# Altium PCB CH32H417MEU6-UHSIF-Top-R0.PcbDoc (part 1 of 2)
Units mil, origin at the board's own origin, x right, y up, seen from the top; angles counter-clockwise.
Board outline 2559.06 x 1771.65 mil, 4 copper layers (Top Layer, Layer 1, Layer 2, Bottom Layer), stack 23.756 mil thick; 66 components, 89 nets, 305 pads, 412 vias.
Unrouted connection lines stored in the file: 29.
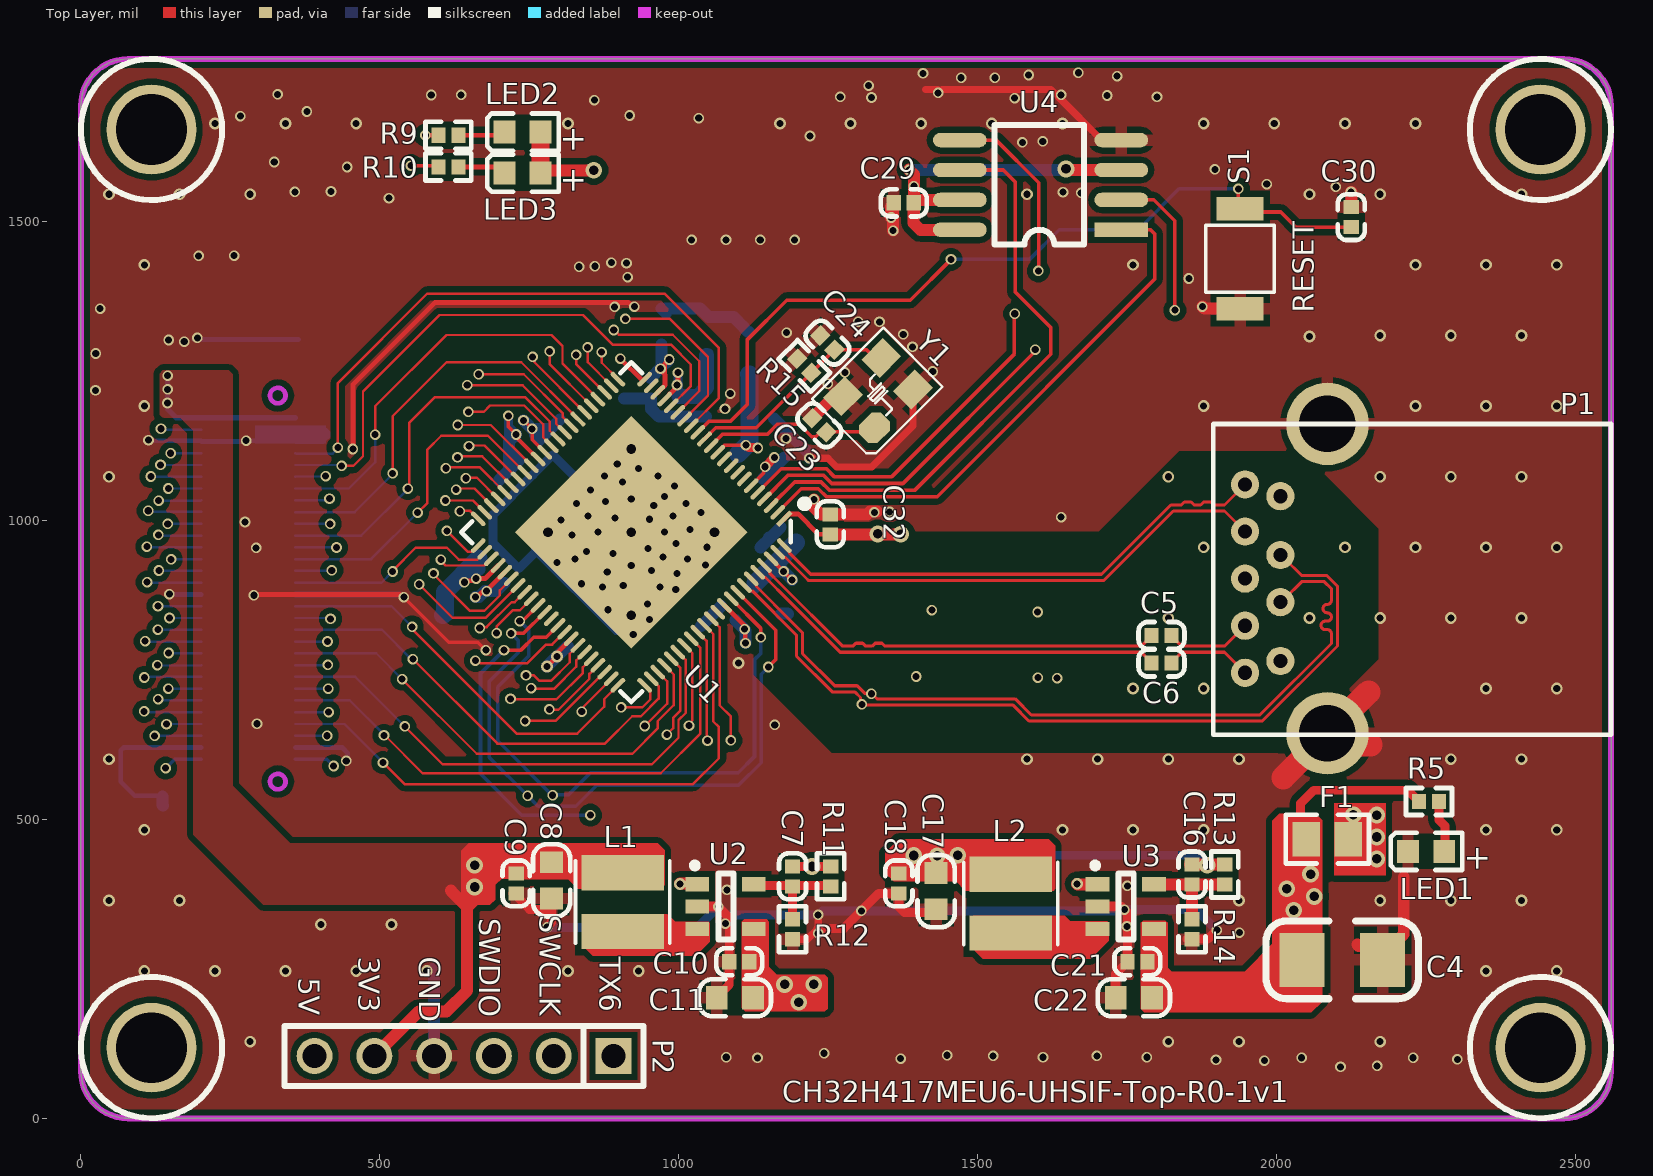
[diagram p0: Top Layer view]
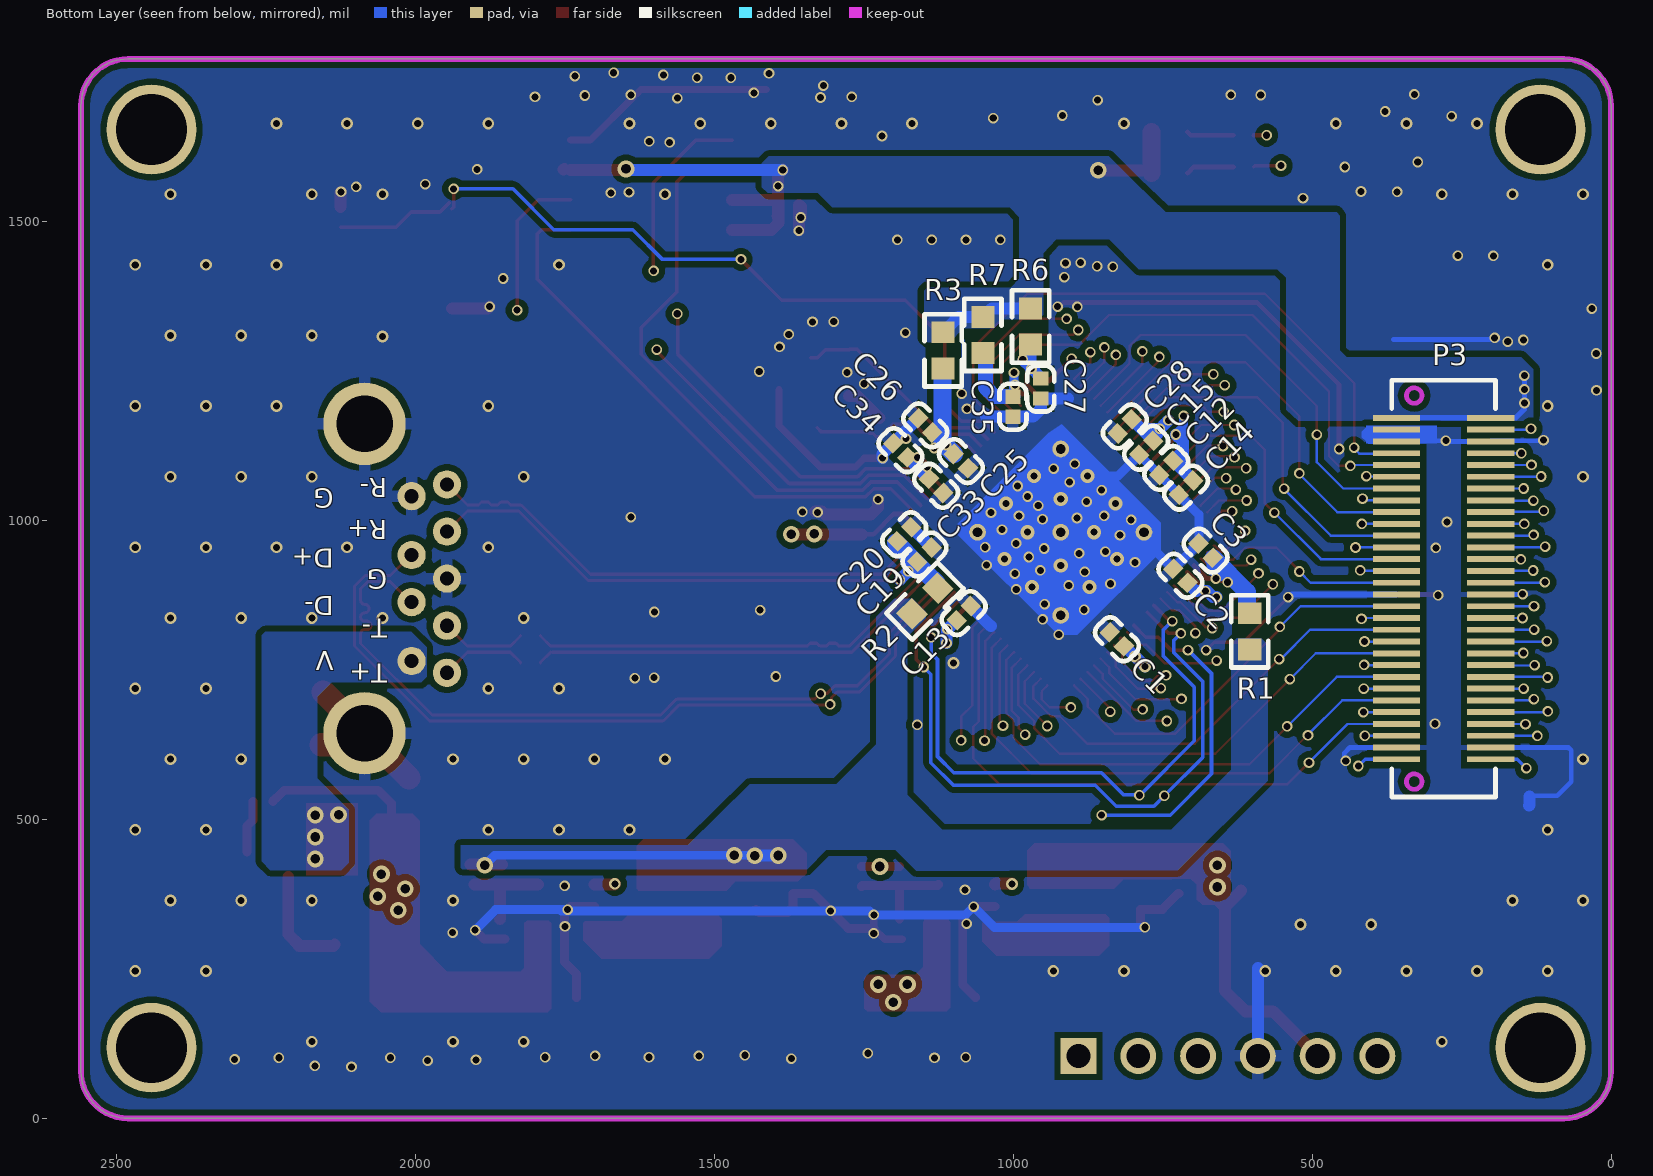
[diagram p1: Bottom Layer view, seen from below]
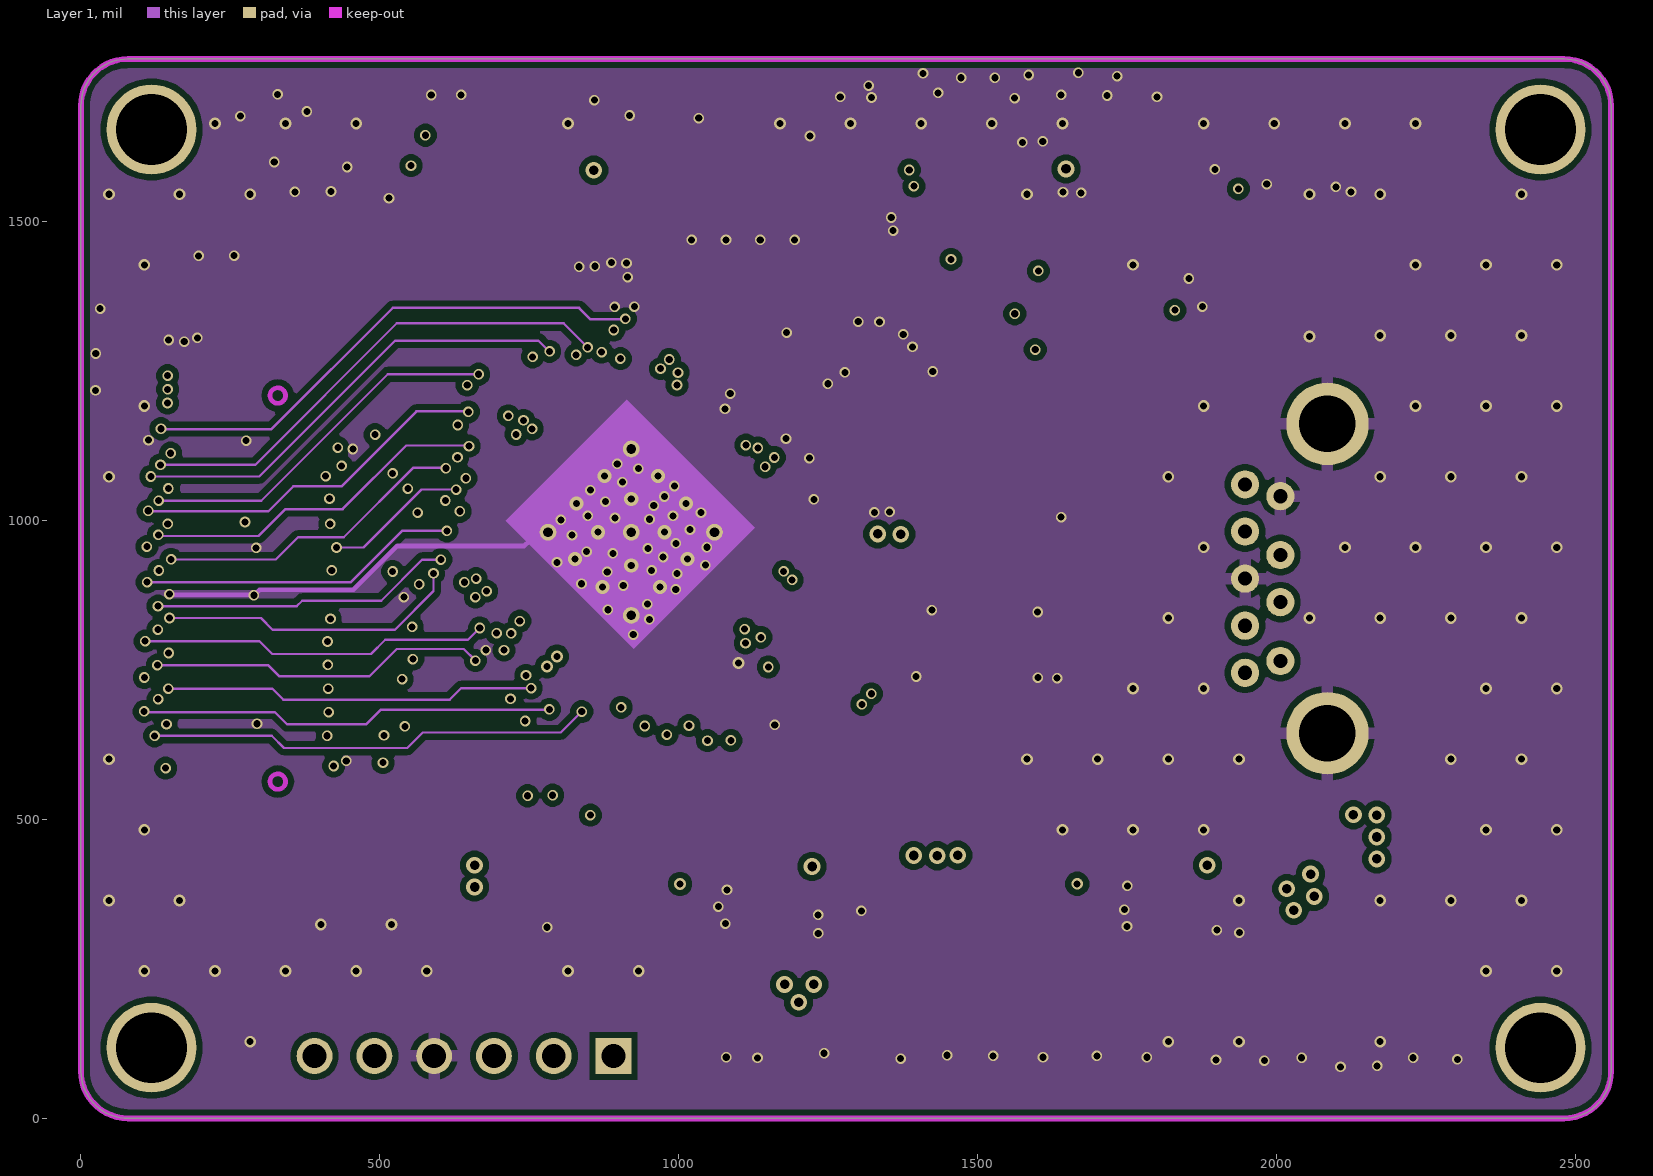
[diagram p2: Layer 1]
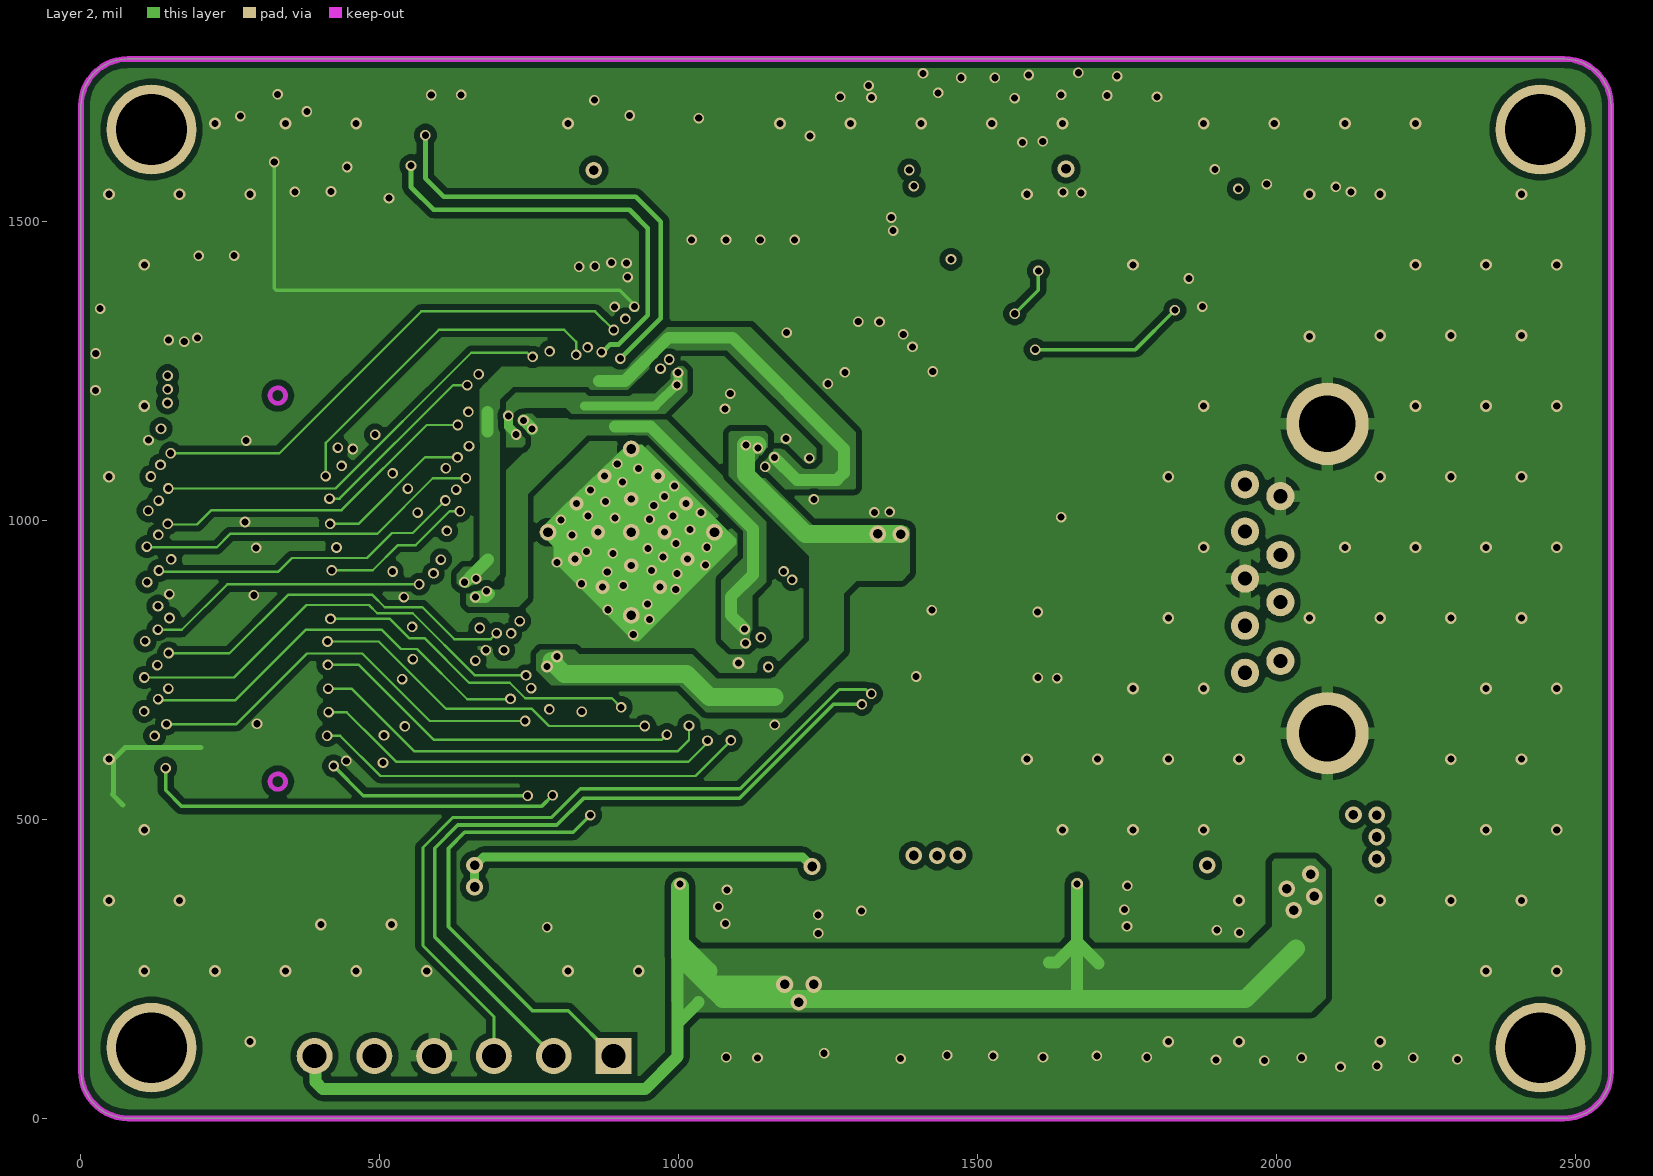
[diagram p3: Layer 2]

## Layer stack, top to bottom
Top Solder: solder mask 0.4, Solder Resist, Dk 3.5
Top Layer: signal copper 1.4
Dielectric 2: prepreg 2.8, PP-006, Dk 4.1
Layer 1: signal copper 1.378
Dielectric 1: dielectric 12.6, FR-4, Dk 4.8
Layer 2: signal copper 1.378
Dielectric 3: prepreg 2.8, PP-006, Dk 4.1
Bottom Layer: signal copper 1.4
Bottom Solder: solder mask 0.4, Solder Resist, Dk 3.5

## Board outline
0,78.74 ccw(c78.74,78.74) 78.74,0 2480.31,0 ccw(c2480.31,78.74) 2559.05,78.74 2559.06,1692.91 ccw(c2480.32,1692.91) 2480.32,1771.65 78.74,1771.65 ccw(c78.74,1692.91) 0,1692.91

## Design rules (kind name [scope] priority, off if disabled: settings)
Clearance Clearance_1 [InPolygon] p1: gap=10 ignorepadtopadclearanceinfootprint=FALSE
Clearance [All] p2: gap=5 ignorepadtopadclearanceinfootprint=FALSE except(4: Arc-SMDPad Track-SMDPad; 6: Arc-THPad Arc-Via Track-THPad Track-Via Via-Fill Via-Poly Via-Region)
ComponentClearance [All] p1 off: gap=10 collisioncheckmode=3 verticalgap=10 showdistances=FALSE
DiffPairsRouting [All] p1: maxlimit=10 minlimit=5 mostfreqgap=8 toplayer_minwidth=4 toplayer_maxwidth=15 toplayer_prefwidth=8 midlayer1_minwidth=4 midlayer1_maxwidth=15 midlayer1_prefwidth=8 midlayer2_minwidth=4 midlayer2_maxwidth=15 midlayer2_prefwidth=8 bottomlayer_minwidth=4 bottomlayer_maxwidth=15 bottomlayer_prefwidth=8 maxuncoupledlength=500
HoleToHoleClearance [All] p1: gap=8 allowstackedmicrovias=TRUE
MinimumAnnularRing [All] p1: minimumring=2.76
MinimumSolderMaskSliver [All] p1 off: minsoldermaskwidth=10
PlaneConnect [All] p1: planeconnectstyle=Direct reliefexpansion=20 reliefentries=4 reliefconductorwidth=10 reliefairgap=10
PolygonConnect PolygonConnect_2 [InPolygonClass('New Class')] p1: connectstyle=Direct reliefconductorwidth=10 reliefentries=4 polygonreliefangle="90 Angle" airgapwidth=10
PolygonConnect PolygonConnect_1 [IsVia] p2: connectstyle=Direct reliefconductorwidth=10 reliefentries=4 polygonreliefangle="90 Angle" airgapwidth=10
PolygonConnect [All] p3: connectstyle=Relief reliefconductorwidth=20 reliefentries=4 polygonreliefangle="90 Angle" airgapwidth=10
RoutingVias [All] p1: holewidth=7.87 width=17.72 viastyle="Through Hole" minholewidth=5.91 minwidth=11.81 maxholewidth=28 maxwidth=50
SilkToSilkClearance [All] p1 off: silktosilkclearance=10
SilkToSolderMaskClearance [IsPad] p1 off: minsilkscreentomaskgap=10 clearancetoexposedcopper=TRUE
SolderMaskExpansion [All] p1: expansion=2 istentingtop=FALSE
Width [All] p1: maxlimit=100 minlimit=4 preferedwidth=5
23 further rules are at their usual default settings.

## Classes and differential pairs
net class NewClass: UFP0 UFP1 UFP2 UFP3 UFP4 UFP5 UFP6 UFP7 UFP8 UFP9 UFP10 UFP11 UFP12 UFP13 UFP14 UFP15 UFP16 UFP17 UFP18 UFP19 UFP20 UFP21 UFP22 UFP23 UFP24 UFP25 UFP26 UFP27 UFP28 UFP29 UFP30 UFP31 UFP32 UFP33 UFP34 UFP35 UFP36 UFP37 UFP38 UFP39 UFP40 UFP41 UFP42 UFP43 UFP44 UFP45 UFP46 UFP47 UFPCLK
polygon class "New Class": 1V2 3V3 +5V NetF1_1 VDD33 VDDIO VDDK VIO18
component class CH32H417MEU6-UHSIF-Top-R0-1v1: C1 C2 C3 C4 C5 C6 C7 C8 C9 C10 C11 C12 C13 C14 C15 C16 C17 C18 C19 C20 C21 C22 C23 C24 C25 C26 C27 C28 C29 C30 C32 C33 C34 C35 F1 L1 L2 LED1 LED2 LED3 P1 P2 P3 R1 R2 R3 R5 R6 R7 R9 R10 R11 R12 R13 R14 R15 S1 U1 U2 U3 U4 Y1
differential pair NewDifferentialPair2: +SWCLK -SWDIO
differential pair NewDifferentialPair1: +NetC5_2 -NetC6_2
differential pair USB_SSTX: +USB_SSTX_p -USB_SSTX_n
differential pair USB_SSRX: +USB_SSRX_p -USB_SSRX_n

## Components (designator, comment, footprint, x,y, rotation, side; value= is the part's Value field where it differs from the comment)
C1 "0.1uF" 0402_C 814.64,789.25 r315 bottom
C2 "0.1uF" 0402_C 708.44,895.45 r315 bottom
C3 "0.1uF" 0402_C 689.97,961.25 r135 bottom
C4 "47uF" 3528_C 2041.94,264.9 r180 top
C5 "0.1uF" 0402_C 1790.41,807.4 r90 top
C6 "0.1uF" 0402_C 1790.41,761.4 r90 top
C7 "20pF" 0402_C 1190.12,421.35 r0 top
C8 "10uF" 0603_C 787.05,367.52 r90 top
C9 "0.1uF" 0402_C 727.82,376.1 r180 top
C10 "0.1uF" 0402_C 1084.26,261.92 r90 top
C11 "10uF" 0603_C 1063.33,201.58 r0 top
C12 "0.1uF" 0402_C 732.07,1099.51 r225 bottom
C13 "0.1uF" 0402_C 1094.58,833.01 r45 bottom
C14 "4.7uF" 0402_C 699.07,1066.51 r225 bottom
C15 "0.1uF" 0402_C 789.36,1109.48 r45 bottom
C16 "20pF" 0402_C 1858.12,424.35 r0 top
C17 "10uF" 0603_C 1430.32,349.52 r90 top
C18 "0.1uF" 0402_C 1367.98,376.1 r180 top
C19 "0.1uF" 0402_C 1136.43,954.61 r225 bottom
C20 "4.7uF" 0402_C 1170.39,988.57 r225 bottom
C21 "0.1uF" 0402_C 1750.05,261.92 r90 top
C22 "10uF" 0603_C 1730.61,201.58 r0 top
C23 "20pF" 0402_C 1223.14,1170.79 r45 top
C24 "20pF" 0402_C 1236.71,1309.02 r45 top
C25 "0.1uF" 0402_C 1075.5,1087.24 r315 bottom
C26 "4.7uF" 0402_C 1158.84,1170.58 r135 bottom
C27 "0.1uF" 0402_C 953.7,1203.55 r0 bottom
C28 "4.7uF" 0402_C 825.06,1145.18 r45 bottom
C29 "0.1uF" 0402_C 1359.44,1530.9 r90 top
C30 "0.1uF" 0402_C 2124.54,1523.76 r0 top
C32 "0.1uF" 0402_C 1253.13,1009.99 r0 top
C33 "0.1uF" 0402_C 1116.98,1045.76 r315 bottom
C34 "4.7uF" 0402_C 1200.32,1129.1 r135 bottom
C35 "0.1uF" 0402_C 1000.31,1173.27 r0 bottom
F1 "2A" 0805 2119.52,466.82 r180 top
L1 "2.2uH" CD32 905.87,361.44 r90 top
L2 "2.2uH" CD32 1555.12,358.89 r90 top
LED1 "RED" 0603+ 2280.03,446.27 r180 top
LED2 "BLUE" 0603+ 768.81,1649.3 r180 top
LED3 "GREEN" 0603+ 768.81,1580.64 r180 top
P1 "USB3.0-A" USB3.0-A-RECEPTACLE 2005.99,764.72 r90 top
P2 "HEADER 6" SIP6-2.54mm 890.72,104.17 r270 top
P3 "HEADER 30x2" BTB-60P-P0.5-FR 280,885.83 r270 bottom
R1 "0R" 0603 604.25,844.51 r270 bottom
R2 "0R" 0603 1126.29,886.55 r315 bottom
R3 "0R" 0603 1117.12,1253.96 r90 bottom
R5 "1K" 0402 2271.3,529.77 r180 top
R6 "0R" 0603 970.84,1293.86 r90 bottom
R7 "0R" 0603 1050.61,1279.67 r90 bottom
R9 "470Ω" 0402 597.78,1643.99 r0 top
R10 "470Ω" 0402 597.78,1591.05 r0 top
R11 "10K" 0402 1253.82,421.35 r270 top
R12 "2.2K" 0402 1190.12,299.43 r90 top
R13 "10K" 0402 1913.12,424.35 r270 top
R14 "10K" 0402 1858.12,299.43 r90 top
R15 "NC" 0402 1197.82,1270.13 r315 top
S1 "" 贴片按键 1938.53,1521.07 r270 top
U1 "CH32H417MEU6" QFN88_10X10 920.4,980.11 r135 top
U2 "8503" SOT-23-5 1030.63,391.29 r270 top
U3 "8503" SOT-23-5 1700.12,391.29 r270 top
U4 "SPI FLASH" SOIC-8_208mil 1739.9,1485.9 r90 top
Y1 "25M" XT3225 1327.41,1154.68 r45 top
? "Comment" HOLE 2440.94,118.11 r0 top
? "Comment" HOLE 118.11,118.11 r0 top
? "Comment" HOLE 118.11,1653.54 r0 top
? "Comment" HOLE 2440.94,1653.54 r0 top

## Footprints (in the part's own frame and the unit in brackets; to place one, negate y for a bottom-side part, rotate by r counter-clockwise, add the part's x,y. Pads: shape width x height; smd on the part's side, far side on the other; paste and mask are expansions set on the pad)
0402 [mm]
  rect 0.6x0.65 smd mask+0.051: 1(0,0) 2(0.85,0)
  silkscreen extent -0.55,-0.58 1.4,0.57
0402_C [mm]
  rect 0.65x0.6 smd mask+0.051: 1(0,0) 2(0,-0.85)
  silkscreen extent -0.58,-1.4 0.57,0.55
0603 [mm]
  rect 0.93x0.98 smd: 1(0,0) 2(1.54,0)
  silkscreen extent -0.76,-0.79 2.3,0.79
0603+ [mm]
  rect 0.93x0.98 smd: 1(0,0) 2(1.54,0)
  silkscreen extent -0.76,-0.79 2.27,0.79
0603_C [mm]
  rect 0.93x0.98 smd mask+0.051: 1(0,0) 2(1.54,0)
  silkscreen extent -0.76,-0.79 2.31,0.79
0805 [mm]
  rect 1.16x1.47 smd: 1(0,0) 2(1.78,0)
  silkscreen extent -0.88,-1.04 2.66,1.03
3528_C [mil]
  rect 75x90 smd: 1(0,0) 2(-135,0)
  silkscreen extent -195,-65 60,65
BTB-60P-P0.5-FR [mm]
  rect 0.25x2 smd mask+0.051: 1(-7.25,2) 2(-7.25,-2) 3(-6.75,2) 4(-6.75,-2) 5(-6.25,2) 6(-6.25,-2) 7(-5.75,2) 8(-5.75,-2) 9(-5.25,2) 10(-5.25,-2) 11(-4.75,2) 12(-4.75,-2) 13(-4.25,2) 14(-4.25,-2) 15(-3.75,2) 16(-3.75,-2) 17(-3.25,2) 18(-3.25,-2) 19(-2.75,2) 20(-2.75,-2) 21(-2.25,2) 22(-2.25,-2) 23(-1.75,2) 24(-1.75,-2) 25(-1.25,2) 26(-1.25,-2) 27(-0.75,2) 28(-0.75,-2) 29(-0.25,2) 30(-0.25,-2) 31(0.25,2) 32(0.25,-2) 33(0.75,2) 34(0.75,-2) 35(1.25,2) 36(1.25,-2) 37(1.75,2) 38(1.75,-2) 39(2.25,2) 40(2.25,-2) 41(2.75,2) 42(2.75,-2) 43(3.25,2) 44(3.25,-2) 45(3.75,2) 46(3.75,-2) 47(4.25,2) 48(4.25,-2) 49(4.75,2) 50(4.75,-2) 51(5.25,2) 52(5.25,-2) 53(5.75,2) 54(5.75,-2) 55(6.25,2) 56(6.25,-2) 57(6.75,2) 58(6.75,-2) 59(7.25,2) 60(7.25,-2)
  Keep-Out Layer circle w0.2: c8.2,-1.25 r0.33
  Keep-Out Layer circle w0.2: c-8.2,-1.25 r0.33
  silkscreen extent -8.85,-2.2 8.85,2.2
CD32 [mm]
  rect 1.5x3.5 smd: 1(-1.25,0) 2(1.25,0)
  silkscreen extent -1.75,-2 1.75,2
HOLE [mm]
  round 3.81 hole 3: 0(0,0)
  silkscreen extent -3,-3 3,3
QFN88_10X10 [mm]
  round 0.711 hole 0.406 mask+0.051: 0(-2.5,-2.5) 0(-2.5,2.5) 0(0,0) 0(2.5,2.5) 0(2.5,-2.5)
  rect 7x7 smd mask+0.051: 0(0,0)
  rect 0.2x0.8 smd mask+0.051: 1(-4.2,-5)
  oval 0.2x0.8 smd mask+0.051: 2(-3.8,-5) 3(-3.4,-5) 4(-3,-5) 5(-2.6,-5) 6(-2.2,-5) 7(-1.8,-5) 8(-1.4,-5) 9(-1,-5) 10(-0.6,-5) 11(-0.2,-5) 12(0.2,-5) 13(0.6,-5) 14(1,-5) 15(1.4,-5) 16(1.8,-5) 17(2.2,-5) 18(2.6,-5) 19(3,-5) 20(3.4,-5) 21(3.8,-5) 22(4.2,-5) 45(4.2,5) 46(3.8,5) 47(3.4,5) 48(3,5) 49(2.6,5) 50(2.2,5) 51(1.8,5) 52(1.4,5) 53(1,5) 54(0.6,5) 55(0.2,5) 56(-0.2,5) 57(-0.6,5) 58(-1,5) 59(-1.4,5) 60(-1.8,5) 61(-2.2,5) 62(-2.6,5) 63(-3,5) 64(-3.4,5) 65(-3.8,5) 66(-4.2,5)
  oval 0.8x0.2 smd mask+0.051: 23(5,-4.2) 24(5,-3.8) 25(5,-3.4) 26(5,-3) 27(5,-2.6) 28(5,-2.2) 29(5,-1.8) 30(5,-1.4) 31(5,-1) 32(5,-0.6) 33(5,-0.2) 34(5,0.2) 35(5,0.6) 36(5,1) 37(5,1.4) 38(5,1.8) 39(5,2.2) 40(5,2.6) 41(5,3) 42(5,3.4) 43(5,3.8) 44(5,4.2) 67(-5,4.2) 68(-5,3.8) 69(-5,3.4) 70(-5,3) 71(-5,2.6) 72(-5,2.2) 73(-5,1.8) 74(-5,1.4) 75(-5,1) 76(-5,0.6) 77(-5,0.2) 78(-5,-0.2) 79(-5,-0.6) 80(-5,-1) 81(-5,-1.4) 82(-5,-1.8) 83(-5,-2.2) 84(-5,-2.6) 85(-5,-3) 86(-5,-3.4) 87(-5,-3.8) 88(-5,-4.2)
  silkscreen extent -5.1,-6.19 5.1,5.1
SIP6-2.54mm [mil]
  rect 60x60 hole 40: 1(0,0)
  round 60 hole 40: 2(0,-100) 3(0,-200) 4(0,-300) 5(0,-400) 6(0,-500)
  silkscreen extent -50,-550 50,50
SOIC-8_208mil [mil]
  rect 24x90 smd: 1(0,0)
  oval 24x90 smd: 2(50,0) 3(100,0) 4(150,0) 5(150,270) 6(100,270) 7(50,270) 8(0,270)
  silkscreen extent -25,62 175,212
SOT-23-5 [mm]
  rect 0.6x1 smd: 1(0,0) 2(0.95,0) 3(1.9,0) 4(1.9,2.4) 5(0,2.4)
  silkscreen extent -0.92,-0.22 2.35,1.54
USB3.0-A-RECEPTACLE [mm]
  round 3.5 hole 2.4: 0(-3.07,-2) 0(10.07,-2)
  round 1.2 hole 0.6: 1(0,0) 2(2.5,0) 3(4.5,0) 4(7,0) 5(7.5,1.5) 6(5.5,1.5) 7(3.5,1.5) 8(1.5,1.5) 9(-0.5,1.5)
  silkscreen extent -3.14,-14.04 10.07,2.85
XT3225 [mm]
  oct 1.3x1.1 smd: 1(0,0)
  rect 1.3x1.1 smd: 2(2.3,0) 3(2.3,1.9) 4(0,1.9)
  silkscreen extent -1.02,-0.8 3.27,2.74
贴片按键 [mm]
  rect 1x2 smd: 1(0,0) 2(4.242,0)
  silkscreen extent 0.69,-1.45 3.55,1.45

## Part data
C1 C2 C3 C4 C5 C6 C7 C8 C9 C10 C11 C12 C13 C14 C15 C16 C17 C18 C19 C20 C21 C22 C23 C24 C25 C26 C27 C28 C29 C32 C33 C34 C35: library part CAP, "Capacitor"
C30: library part Cap, "Capacitor"
F1: library part FUSE1, "Fuse"
L1 L2: library part INDUCTOR
LED1 LED2 LED3: library part LED, "Typical INFRARED GaAs LED"
P2: "Header, 6-Pin"
P3: "Header, 30-Pin, Dual row"
R1 R2 R3 R5 R6 R7 R9 R10 R15: library part RES
R11 R12 R13 R14: library part R
S1: library part KEY1
U1: "RISC-V FPU HD-MCU, 384MHz, USB3.0 & PD, 100M Ethernet, DVP, SDMMC, QSPI, OPA, ADC, DAC"
U2 U3: library part FP6160
U4: library part W25Q64
Y1: library part XTAL, "Crystal Oscillator", LatestRevisionDate=17-Jul-2002, LatestRevisionNote="Re-released for DXP Platform.", PackageReference=R38, Published=8-Jun-2000, Publisher="Altium Limited"

## Via types
v1: diameter 17.72, hole 11.81, Top Layer to Bottom Layer, tented both sides, 286 vias
v2: diameter 19.68, hole 11.81, Top Layer to Bottom Layer, tented both sides, 92 vias
v3: diameter 28, hole 16, Top Layer to Bottom Layer, tented both sides, 22 vias
v4: diameter 23.62, hole 11.81, Top Layer to Bottom Layer, tented both sides, 12 vias

## Nets (pads, with @x,y where several pads share a name; then routed paths per layer and width w, separated by ;. In a path a pad name is that pad's centre, name@x,y a point inside that pad or via, vN(x,y) a via of type N, cw(c..) or ccw(c..) an arc to the next point about the centre after c; other vN are vias at no path point)
1V2: C16.1 C17.2 C18.2 L2.2 R1.2 R2.2 R13.1 | length 752.8
  Top Layer w20: C16.1@1855.12,424.35 1882.75,424.35 v3(1883.87,423.23) 1884.95,424.31 1907.84,424.31 R13.1@1907.84,424.63
  Top Layer w30: C18.2@1367.98,412.1 L2.2@1555.12,412.1
  Bottom Layer w15: v3@1432.17,439.85 v3(1466.45,439.85) 1867.26,439.85 v3(1883.87,423.23)
  Bottom Layer w20: R2.2@1170.53,843.01 1171.89,844.37 1181.61,844.37 R2.2@1182.97,843.01 ; v3@1392.65,439.1 v3(1432.17,439.1)
  other v3: 1392.65,439.46
3V3: C7.1 C8.2 C9.2 C29.2 L1.2 LED2.1 LED3.1 P2.5 P3.1 P3.2 R3.2 R6.2 R7.2 R11.1 U4.3 U4.7 U4.8 | length 2669.7
  Top Layer w15: C7.1@1190.12,421.35 R11.1@1253.82,421.35
  Top Layer w20: P2.5@490.72,104.17 565.47,178.92 611.4,178.92 646.04,213.56 646.04,353.32 ; 618.78,380.57 646.04,353.32 ; 673.3,380.57 646.04,353.32 ; C9.2@736.65,414.65 669.42,414.65 646.04,391.27 646.04,353.32 ; LED3.1@767.26,1584.77 767.87,1585.39 768.81,1585.39 v3(857.75,1585.39) ; v1@1384.65,1586.52 1393.2,1577.97 1393.2,1531.19 C29.2@1392.9,1530.9 1392.9,1510.76 1394.53,1509.13 ; C29.2@1392.05,1533.56 1392.05,1497.61 1403.76,1485.9 U4.8@1469.9,1485.9 ; C29.2@1397.02,1534.39 1398.52,1535.9 U4.7@1469.9,1535.9 ; v3@1646.44,1585.9 U4.3@1739.9,1585.9 ; U4.3@1750.75,1587.57 U4.3@1751.66,1586.66
  Top Layer w30: C9.2@736.65,414.65 L1.2@905.87,414.65 ; LED3.1@768.81,1580.64 768.81,1585.39 LED2.1@768.81,1649.3
  Layer 2 w15: v3(658.32,386.77) v3(658.32,423.09) 659.59,423.09 673.61,437.11 1206.65,437.11 v3(1222.77,421)
  Bottom Layer w8: v1(144.8,1196.22) v1@145,1196.01 ; v1(145,1241.98) v1(145,1219) v1@145,1196.01 ; 159.02,1171.26 145,1185.29 v1@145,1196.01
  Bottom Layer w9: v1@145,1196.01 145,1186.09 159.82,1171.26 P3.2@358.74,1171.26
  Bottom Layer w20: R6.2@970.84,1354.49 R6.2@978.43,1346.9 ; R6.2@971.82,1354.49 1035.43,1354.49 1049.62,1340.3 1091.41,1340.3 1107.82,1323.88 1107.82,1322.9 1116.13,1314.59 R3.2@1117.12,1314.59 ; v1(1385.28,1585.91) 1639.84,1585.91 v3@1643.64,1589.7
  other v1: 1393.05,1558.83
  other v3: 1647.41,1587.61
+5V: C4.1 C10.2 C11.2 C21.2 C22.2 F1.2 P2.6 R5.2 U2.1 U2.4 U3.1 U3.4 | length 3063.1
  Top Layer w15: F1.2@2039.6,475.17 2039.6,526.35 2061.83,548.58 2219.03,548.58 2232.54,535.07 2233.52,535.07 2237.84,530.76 R5.2@2237.84,529.77
  Top Layer w20: v2@1002,392.87 1029.05,392.87 U2.1@1030.63,391.29 ; v2(1666.12,392.13) 1666.96,391.29 U3.1@1700.12,391.29 ; C22.2@1789.24,201.58 1789.24,314.68 1791.05,316.49 U3.4@1794.6,316.49
  Top Layer w30: 1175.01,201.58 1175.3,201.28
  Layer 2 w20: P2.6@390.72,104.17 392.35,102.54 392.35,60.95 404.45,48.84 943.5,48.84 997.73,103.07 997.73,158.62 ; 997.73,270.59 997.73,158.62 ; 1033.21,194.1 997.73,158.62 ; 1618.92,260.12 1631.47,260.12 1666.12,294.77 ; 1666.12,199.3 1666.12,294.77 ; v2(1666.12,392.13) 1666.12,294.77 ; 1701.77,259.12 1666.12,294.77
  Layer 2 w30: 1002,288.37 v2@1002,387.87 ; 1049.39,245.98 1002,293.37 1002,270.59 1048.79,223.8 ; v3(1176.83,223.8) 1048.79,223.8 ; 2032.04,283.82 1947.52,199.3 1666.12,199.3 1177.28,199.3 1175.3,201.28 1173.32,199.3 1073.28,199.3 1048.79,223.8
  other v2: 1002,391.87
  other v3: 1200.33,193.93 1225.48,223.8 2028.31,347.89 2062.77,370.98 2016.58,383.81 2056.53,408.38
GND: C1.2 C2.2 C3.1 C4.2 C8.1 C9.1 C10.1 C11.1 C12.2 C13.2 C14.2 C15.1 C17.1 C18.1 C19.1 C20.1 C21.1 C22.1 C23.1 C24.1 C25.1 C26.1 C27.1 C28.1 C29.1 C30.1 C32.1 C33.1 C34.1 C35.1 LED1.2 P1.0 P1.4 P1.7 P2.4 P3.4 P3.5 P3.6 P3.31 P3.32 P3.57 P3.58 R12.1 R14.1 R15.1 S1.2 U1.0 U2.2 U3.2 U4.4 Y1.2 Y1.4 | length 8454.3
  Top Layer w6: v1@148,875.54 v1@148.22,875.76 ; v1(540.04,871.57) 615.43,796.18 663.85,796.18 v1(677.11,782.92)
  Top Layer w8: v1(454.92,1119.26) 454.92,1226.94 592.04,1364.06 916.07,1364.06 922.87,1357.26 v1(925.5,1357.26)
  Top Layer w9: v1@289.33,875.98 533.27,875.98 537.68,871.57 v1(540.04,871.57)
  Top Layer w12: R12.1@1185.12,299.43 1214.9,299.43 1233.01,317.54 v1(1233.01,340.27) ; v1(1218.23,1103.91) 1248.92,1103.91 1252.78,1100.05 1263.69,1089.14 1322.53,1089.14 1391.44,1158.06 Y1.2@1391.44,1218.71 ; 1412.27,1720.27 v1@1433.48,1720.27 ; v1@1433.48,1717.62 1435.02,1716.08 1436.12,1716.08 1440.31,1720.27 1622.53,1720.27 1630.06,1712.74 1636.71,1712.74 1637.49,1711.96 v1@1637.49,1709.78 ; v1@1635.26,1707.54 1706.9,1635.9 U4.4@1739.9,1635.9
  Top Layer w15: C9.1@722.82,376.1 723.81,376.1 750.4,349.52 787.05,349.52 787.05,327.61 779.57,320.13 v1(779.57,319.4) ; U2.2@1030.63,353.89 v1(1066.06,353.89) 1084.26,335.69 C10.1@1084.26,261.92 1084.26,223.5 1063.33,202.56 C11.1@1063.33,201.58 ; v1@1233.01,317.54 1275.89,317.54 v1(1305.18,346.82) 1334.46,376.1 C18.1@1367.98,376.1 1367.98,353.4 1377.26,344.13 1424.93,344.13 C17.1@1430.32,349.52 ; U3.2@1700.12,353.89 1739.92,353.89 v1(1744.98,348.83) 1750.05,343.77 C21.1@1750.05,261.92 1750.05,260.94 1730.61,241.5 C22.1@1730.61,201.58 ; R14.1@1850.12,299.43 1884.51,299.43 v1(1899.72,314.63)
  Top Layer w20: C23.1@1223.14,1170.79 1259.92,1207.58 Y1.4@1274.52,1207.58 ; v1(1225.86,1035.05) 1225.86,1021.71 1237.57,1009.99 C32.1@1253.13,1009.99 1315.07,1009.99 1319.63,1014.56 v1@1331.74,1014.56 ; v1(1355.17,1506.51) 1355.17,1524.48 1358.38,1527.69 v1(1358.38,1484.43) ; v1(1875.64,1357.38) 1878.94,1354.07 S1.2@1938.53,1354.07 ; v1(2124.1,1549.3) 2124.54,1548.86 C30.1@2124.54,1523.76 ; 2134.53,290.29 2136.48,288.34 2194.34,288.34 2194.34,289.8 2212.29,307.76 2212.29,403.62
  Top Layer w39.37: 2010.74,569.86 P1.0@2084.73,643.85 ; 2153.57,712.69 P1.0@2084.73,643.85 ; 2157.01,624.34 2156.33,625.02 2103.57,625.02 P1.0@2084.73,643.85
  Layer 1 w8: v1@148,875.54 288.81,875.54 289.7,874.66 298.87,883.83 455.74,883.83 529.16,957.25 741.54,957.25 749.54,965.25 801.85,965.25 809.85,957.25
  Layer 2 w6: v1(112.99,1133.98) v1@114.52,1132.44 ; v1(323.36,1599.22) 323.36,1388.29 326.88,1384.78 901.15,1384.78 925.5,1360.43 v1(925.5,1357.26)
  Layer 2 w8: 70.41,523.77 52.39,541.79 54.65,544.06 54.65,600.84 73.89,620.08 201.26,620.08
  Bottom Layer w8: v1(112.99,1133.98) 113.81,1133.15 P3.5@200.71,1133.15 ; 136.44,538.41 135.44,539.41 90.11,539.41 66.69,562.83 66.69,615.39 71.38,620.08 P3.57@201.26,620.08 ; v1@148,875.54 148.3,875.84 201.12,875.84 P3.31@201.26,875.98 ; v1@189.16,1302.32 364.2,1302.32 ; P3.5@201.26,1131.89 274.92,1131.89 v1(276.23,1133.2) 318.79,1133.2 319.18,1132.81 P3.6@357.43,1132.81 ; P3.6@357.43,1133.2 P3.6@358.74,1131.89 404.66,1131.89 413.03,1140.26 413.03,1146.89 408.35,1151.57 P3.4@358.74,1151.57 ; P3.58@358.74,620.08 437.15,620.08 446.43,610.8 446.43,598.02 v1@448.65,595.8
  Bottom Layer w10: P3.32@358.74,875.98 533.54,875.98 537.96,871.57 v1(540.04,871.57)
  Bottom Layer w15: U1.0@781.21,980.11 778.72,977.62 778.72,965.73 C2.2@732.1,919.12 C3.1@689.97,961.25 689.27,961.95 689.27,1009.39 C12.2@755.73,1075.85 C15.1@789.36,1109.48 824.52,1074.32 v4(875.42,1074.32) ; v1@781.57,319.4 1031.57,319.4 v1(1066.06,353.89) 1079.69,340.27 v1@1232.88,340.27 ; v1(1233.01,340.27) 1233.74,340.27 1240.3,346.82 v1(1305.18,346.82) 1742.24,346.82 1743.73,348.31 1744.25,348.31 v1@1744.98,347.57 ; v1@1744.98,346.82 1755.4,346.82 ; v1(1744.98,348.83) 1865.52,348.83 v1(1899.72,314.63)
  Bottom Layer w20: 136.44,538.41 136.44,523.98 137.34,523.07 ; P2.4@590.72,104.17 590.72,251.29 ; 908.55,1203.55 C27.1@953.7,1203.55 953.7,1186.21 966.64,1173.27 C35.1@1000.31,1173.27 1045.3,1173.27 ; 1037.14,822.89 C13.2@1070.92,856.67 ; C19.1@1136.43,954.61 1153.41,971.59 ; 1150.53,971.59 1153.41,971.59 ; C26.1@1158.84,1170.58 1199.97,1129.45 C34.1@1200.67,1129.45 ; C20.1@1170.39,988.57 1153.41,971.59 ; C34.1@1200.32,1129.1 1218.23,1111.19 v1(1218.23,1103.91)
  other v1: 2106.55,85.82 2167.74,87.51 1979.23,96.43 1898.3,97.59 2302.1,98.48 1370.8,99.82 1131.53,100.93 2041.6,101.22 2228.06,101.22 1079.23,102.04 1608.95,102.04 1782.56,102.04 1525.49,104.27 1699.09,104.27 1448.7,105.38 1242.82,108.72 1233.13,309.33 1937.35,310.35 1749.4,320.96 1077.73,325.4 1080.51,382.03 1749.96,388.67 443.79,597.66 1160.36,657.93 294.45,659.77 1632.76,736.07 1600.45,737.05 1396.94,738.84 923.74,808.75 950.6,834.41 1599.96,846.75 1423.22,849.77 881.33,850.4 947.44,859.74 289.33,874.66 148,876.54 994.77,884.55 907,890.98 837.13,893.88 997.03,910.77 880.25,913.8 954.37,916.26 1044.31,925.14 796.17,929.81 973.76,938.59 889.58,944.73 845.9,947.67 948.27,952.85 292.94,953.98 1046.7,954.98 995.11,961.41 821.35,975.16 1018.67,984.48 274.45,997.15 802.7,1000.68 950.93,1001.76 893.26,1003.87 1639.17,1005.4 847.86,1007.55 990.2,1007.55 1036.97,1012.73 1326.92,1013.39 1352.53,1014.25 958.05,1024.48 877.06,1031.36 975.85,1039.83 852.03,1050.5 992.35,1057.35 905.53,1063.75 932.28,1086.57 896.94,1094.43 1179.23,1136.59 1077.1,1186.32 1085.92,1211.82 24.4,1217.4 1249.27,1228.39 1277.76,1247.45 1424.62,1248.83 24.83,1278.92 1390.72,1290.18 172.81,1298.97 146.66,1301.63 194.78,1305.05 1375.25,1310.98 1180.14,1314.02 1335.49,1331.85 1300.02,1332.34 32.02,1354.07 892.58,1357.05 1852.88,1404.44 914.44,1406.56 833.24,1424.08 859.51,1424.87 887.25,1430.95 912.45,1430.05 196.9,1442.17 256.11,1442.77 1021.39,1469.02 1078.77,1469.02 1136.15,1469.02 1193.52,1469.02 515.23,1538.91 1672.72,1547.66 1642.46,1548.93 357.81,1549.21 418.21,1549.96 2098.92,1557.72 1983.18,1562.17 1896.31,1586.79 445.33,1590.93 1574.54,1632.17 1608.6,1633.85 1219.32,1642.68 1033.3,1672.59 266.54,1675.93 917.56,1677.04 377.82,1683.72 858.76,1702.6 1561.45,1706.08 1322.19,1707.19 1269.88,1708.3 1799.61,1708.3 1716.14,1710.53 585.89,1711.31 635.99,1711.65 1639.36,1711.64 328.87,1712.25 1433.48,1714.98 1317.28,1727.03 1472.12,1740.14 1528.52,1740.14 1732.88,1742.92 1584.93,1744.77 1408.31,1747.54 1668.15,1748.47
  other v2: 283.15,128.03 1818.58,128.03 1936.69,128.03 2172.91,128.03 105.98,246.14 224.09,246.14 342.2,246.14 460.31,246.14 578.42,246.14 814.64,246.14 932.75,246.14 2350.08,246.14 2468.19,246.14 401.26,324.25 519.37,324.25 46.93,364.25 165.04,364.25 1936.69,364.25 2172.91,364.25 2291.02,364.25 2409.13,364.25 105.98,482.36 1641.41,482.36 1759.52,482.36 1877.63,482.36 2350.08,482.36 2468.19,482.36 46.93,600.47 1582.36,600.47 1700.47,600.47 1818.58,600.47 1936.69,600.47 2291.02,600.47 2409.13,600.47 1759.52,718.58 1877.63,718.58 2350.08,718.58 2468.19,718.58 1099.69,761.43 1818.58,836.69 2054.8,836.69 2172.91,836.69 2291.02,836.69 2409.13,836.69 1877.63,954.8 2113.85,954.8 2231.96,954.8 2350.08,954.8 2468.19,954.8 46.93,1072.91 1818.58,1072.91 2172.91,1072.91 2291.02,1072.91 2409.13,1072.91 105.98,1191.02 1877.63,1191.02 2231.96,1191.02 2350.08,1191.02 2468.19,1191.02 2054.8,1307.55 2172.91,1309.13 2291.02,1309.13 2409.13,1309.13 105.98,1427.24 1759.52,1427.24 2231.96,1427.24 2350.08,1427.24 2468.19,1427.24 46.93,1545.35 165.04,1545.35 283.15,1545.35 1582.36,1545.35 2054.8,1545.35 2172.91,1545.35 2409.13,1545.35 224.09,1663.46 342.2,1663.46 460.31,1663.46 814.64,1663.46 1168.97,1663.46 1287.08,1663.46 1405.19,1663.46 1523.3,1663.46 1641.41,1663.46 1877.63,1663.46 1995.74,1663.46 2113.85,1663.46 2231.96,1663.46
  other v4: 872.59,888.73 968.21,888.73 920.4,924.43 826.19,935.13 1014.61,935.13 864.72,980.11 976.08,980.11 829.02,1027.92 1011.78,1027.92 920.4,1035.79 965.39,1074.32
LED1: R9.1 U1.22 | length 831.3
  Top Layer w8: v1(576.13,1643.99) R9.1@597.78,1643.99 ; v1(902.24,1270.35) 939.47,1233.12 939.56,1233.12 U1.22@942.67,1236.23
  Layer 2 w8: v1(576.13,1643.99) 576.13,1571.93 606.9,1541.16 927.87,1541.16 969.56,1499.47 969.56,1337.67 v1(902.24,1270.35)
LED2: R10.1 U1.23 | length 811.7
  Top Layer w4: v1(870.96,1281.19) 870.96,1263.4 U1.23@898.13,1236.23
  Top Layer w6: v1(552.03,1593.16) 595.67,1593.16 R10.1@597.78,1591.05
  Layer 2 w8: v1(552.03,1593.16) 552.03,1557.1 589.82,1519.31 917.47,1519.31 948.08,1488.7 948.08,1342.97 899.27,1294.16 885.45,1294.16 872.48,1281.19 v1(870.96,1281.19)
NetC5_2: C5.2 P1.8 | length 145.3
  Top Layer w5.1: C5.2@1823.87,807.4 1823.87,806.42 1840.84,789.45 1912.62,789.45 P1.8@1946.94,823.77
NetC6_2: C6.2 P1.9 | length 145.3
  Top Layer w5.1: C6.2@1823.87,761.4 1823.87,762.39 1840.84,779.35 1912.62,779.35 P1.9@1946.94,745.03
NetC7_2: C7.2 R11.2 R12.2 U2.5 | length 185.1
  Top Layer w15: U2.5@1125.12,391.29 1126.82,389.59 1185.12,389.59 1252.12,389.59 R11.2@1253.82,387.89 ; R12.2@1190.12,332.89 C7.2@1190.12,387.89
NetC16_2: C16.2 R13.2 R14.2 U3.5 | length 164.1
  Top Layer w20: U3.5@1794.6,391.29 1852.75,391.29 R13.2@1900.73,391.29 ; R14.2@1858.12,332.89 C16.2@1858.12,390.89
NetF1_1: F1.1 P1.1
  other v3: 2167.29,433.74 2167.29,470.36 2167.29,506.98 2128.18,507.57
NetL1_1: L1.1 U2.3 | length 126.5
  Top Layer w20: L1.1@905.87,312.23 L1.1@908.33,314.68 ; L1.1@908.33,315.68 U2.3@1028.82,315.68 ; U2.3@1028.82,314.68 U2.3@1030.63,316.49
NetL2_1: L2.1 U3.3 | length 147.8
  Top Layer w20: L2.1@1555.12,309.68 1561.93,316.49 U3.3@1700.12,316.49
NetLED1_1: LED1.1 R5.1 | length 88.4
  Top Layer w15: R5.1@2271.3,529.77 2271.3,498.46 2281.36,488.39 LED1.1@2281.36,445.5
NetLED2_2: LED2.2 R9.2 | length 79.1
  Top Layer w8: R9.2@631.25,1643.99 702.87,1643.99 LED2.2@708.18,1649.3
NetLED3_2: LED3.2 R10.2 | length 81.2
  Top Layer w8: R10.2@631.25,1591.05 697.77,1591.05 LED3.2@708.18,1580.64
NRST: C30.2 S1.1 U1.14 | length 1369.5
  Top Layer w6: U1.14@1031.76,1147.14 1050.29,1165.67 1086.44,1165.67 1114.72,1193.95 1114.72,1302.45 1180.38,1368.11 1386.87,1368.11 v1(1455.06,1436.29) ; v1(1935.83,1554.31) 1935.83,1523.76 S1.1@1938.53,1521.07 ; S1.1@1942.76,1531.44 1958.62,1515.58 2006.78,1515.58 2032.06,1490.3 C30.2@2124.54,1490.3
  Bottom Layer w6: v1(1455.06,1436.29) 1586.41,1436.29 1636.24,1486.12 1768.39,1486.12 1836.58,1554.31 v1(1935.83,1554.31)
PA11: U1.56
PF14: U1.78
RX1: P3.60 U1.55 U1.81 | length 1556.9
  Top Layer w6: v1(719.59,810.81) 739.97,810.81 U1.55@775.64,846.48 ; U1.81@1098.57,879.89 1162.05,816.41 1162.05,767.16 v1(1149.61,754.72)
  Layer 2 w6: v1(422.59,589.12) 472.36,539.35 v1(747.11,539.35)
  Bottom Layer w6: P3.60@358.74,600.39 411.32,600.39 v1(422.59,589.12) ; v1(719.59,810.81) 731.45,798.96 731.45,779 682.99,730.54 682.99,603.47 v1(747.11,539.35) 764.53,521.92 827.55,521.92 862.73,557.11 1099.85,557.11 1137.56,594.82 1137.56,742.67 v1(1149.61,754.72)
RX8: P3.59 U1.54 U1.80 | length 1822.8
  Top Layer w6: v1(733.94,831.47) 736.19,833.71 740.6,833.71 U1.54@764.5,857.62 ; U1.80@1087.43,868.75 1137.23,818.96 v1(1137.23,804.37)
  Layer 2 w6: v1(141.66,585.44) 141.66,548.39 168.56,521.49 770.16,521.49 v1(788.91,540.24)
  Bottom Layer w4: P3.59@201.17,600.48 P3.59@201.26,600.39
  Bottom Layer w6: v1(141.66,585.44) 156.7,600.48 P3.59@201.17,600.48 ; v1(733.94,831.47) 748.66,816.75 748.66,772.77 697.02,721.13 697.02,631.09 v1@786.79,541.32 ; v1(788.91,540.24) 787.87,540.24 v1@786.79,541.32 ; v1(1137.23,804.37) 1137.23,777.93 1126.56,767.26 1126.56,605.08 1099.23,577.74 852.31,577.74 815.89,541.32 v1@786.79,541.32
SPI_CS: U1.2 U4.1 | length 937.7
  Top Layer w6: U1.2@1165.38,1013.52 1204.91,1053.05 1233.31,1053.05 1246.77,1039.59 1431.92,1039.59 1796.2,1403.86 1796.2,1478.53 1788.84,1485.9 U4.1@1739.9,1485.9
SPI_MISO: U1.4 U4.2 | length 1083.2
  Top Layer w6: U1.4@1143.11,1035.79 1182.37,1075.05 1242.43,1075.05 1255.89,1061.59 1374.77,1061.59 1596.01,1282.83 v1(1596.01,1285.56) ; U4.2@1739.9,1535.9 1794.32,1535.9 1829.44,1500.78 v1(1829.44,1351.45)
  Layer 2 w6: v1(1596.01,1285.56) 1763.55,1285.56 v1(1829.44,1351.45)
SPI_MOSI: U1.5 U4.5 | length 1000.9
  Top Layer w6: U1.5@1131.98,1046.92 1171.1,1086.05 1246.98,1086.05 1260.44,1072.59 1355.54,1072.59 1561.22,1278.27 1561.22,1344.89 v1(1561.75,1345.42) ; U4.5@1469.9,1635.9 1530.47,1635.9 1601.94,1564.42 1601.94,1417.91 v1(1601.15,1417.12)
  Layer 2 w6: v1(1561.75,1345.42) 1601.15,1384.82 v1(1601.15,1417.12)
SPI_SCK: U1.3 U4.6 | length 997.7
  Top Layer w6: U1.3@1154.25,1024.65 1193.64,1064.05 1237.87,1064.05 1251.33,1050.59 1395.05,1050.59 1622,1277.53 1622,1322.41 1562.26,1382.15 1562.26,1566.41 1542.78,1585.9 U4.6@1469.9,1585.9
SWCLK: P1.3 P2.2 U1.82 | length 2620.9
  Top Layer w5.1: U1.82@1109.71,891.03 1118.59,882.14 1122.58,882.14 1196.77,807.96 1196.77,772.83 1256.34,713.25 1294.04,713.25 1303.77,703.53 1303.77,694.61 v1(1306.12,692.25) 1307.04,691.33 1558.32,691.33 1585.34,664.32 1975.89,664.32 2101.44,789.87 2101.44,889.7 2083.58,907.56 2041.57,907.56 2012.99,936.14 P1.3@2012.99,941.88
  Layer 2 w6: P2.2@790.72,104.17 591.62,303.26 591.62,451.83 630.2,490.41 795.98,490.41 840.45,534.88 1101.15,534.88 1258.52,692.25 v1(1306.12,692.25)
SWDIO: P1.2 P2.3 U1.83 | length 2626.2
  Top Layer w5.1: U1.83@1120.84,902.16 1129.72,893.28 1129.72,889.28 1188.97,830.04 1206.87,812.14 1206.87,777.01 1260.53,723.35 1298.23,723.35 1310.91,710.67 1321.18,710.67 v1(1321.94,709.9) ; v1@1323.41,707.09 1325.59,707.09 1331.24,701.43 1562.51,701.43 1589.52,674.42 1971.7,674.42 2091.34,794.05 2091.34,807.58 2091.34,810.13 ccw(c2084.29,810.13) 2084.29,817.18 2080.84,817.18 cw(c2080.84,824.23) 2080.84,831.28 2084.29,831.28 ccw(c2084.29,838.33) 2084.29,845.38 cw(c2084.29,852.43) 2084.29,859.48 ccw(c2084.29,866.53) 2091.34,866.53 2091.34,876.61 2091.34,885.52 2079.4,897.46 2041.57,897.46 2012.99,868.89 P1.2@2012.99,863.14
  Layer 2 w5.1: P2.3@690.72,104.17 690.72,169.94 572.04,288.61 572.04,452.95 622.41,503.32 787.54,503.32 835.31,551.09 1102.43,551.09 1268.36,717.01 1312.65,717.01 1319.75,709.9 v1(1321.94,709.9)
TX6: P2.1 U1.57 | length 1299.6
  Top Layer w6: v1(707.55,782.97) 735.91,782.97 757.5,804.57 778.27,804.57 U1.57@797.91,824.21
  Layer 2 w6: v1(851.98,506.84) 823.25,478.1 641.62,478.1 614.82,451.3 614.82,320.21 755.25,179.77 815.11,179.77 P2.1@890.72,104.17
  Bottom Layer w6: v1(707.55,782.97) 668.33,743.75 668.33,575.95 737.45,506.84 v1(851.98,506.84)
UFP0: P3.3 U1.16 | length 1221.8
  Top Layer w4: v1(910.41,1336.94) 985.09,1336.94 1048.66,1273.37 1048.66,1208.59 U1.16@1009.49,1169.41
  Layer 1 w4: v1(133.95,1153.17) 134.52,1152.6 318.82,1152.6 521.55,1355.32 833.15,1355.32 852.49,1335.99 909.46,1335.99 v1(910.41,1336.94)
  Layer 2 w4: v1(133.95,1153.17) v1@135.54,1151.57
  Bottom Layer w4: v1@135.54,1151.57 P3.3@201.26,1151.57
UFP1: P3.7 U1.17 | length 1168.1
  Top Layer w4: v1(891.12,1318.3) 891.8,1318.3 899.7,1310.4 989.74,1310.4 1034.03,1266.11 1034.03,1216.23 U1.17@998.35,1180.55
  Layer 2 w4: v1(150.17,1112.2) 331.86,1112.2 569.07,1349.42 860.01,1349.42 v1(891.12,1318.3)
  Bottom Layer w4: v1(150.17,1112.2) P3.7@201.26,1112.2
UFP2: P3.10 U1.18 | length 946.7
  Top Layer w4: v1(435.99,1090.94) 455.5,1090.94 471.78,1107.22 471.78,1215.52 599.58,1343.32 839.45,1343.32 888.96,1293.8 986.58,1293.8 1020.17,1260.22 1020.17,1224.64 U1.18@987.22,1191.68
  Bottom Layer w4: P3.10@358.76,1092.5 434.42,1092.5 v1(435.99,1090.94)
UFP3: P3.9 U1.24 | length 977.8
  Top Layer w4: v1(847.54,1289.26) 847.54,1264.55 U1.24@887,1225.09
  Layer 1 w4: v1(133.13,1092.73) 291.54,1092.73 528.28,1329.46 807.33,1329.46 v1(847.54,1289.26)
  Bottom Layer w4: v1(133.13,1092.73) 133.35,1092.52 P3.9@201.26,1092.52
UFP4: P3.12 U1.25 | length 716.5
  Top Layer w4: v1(828.26,1276.76) 828.26,1261.55 U1.25@875.86,1213.96
  Layer 2 w4: v1(409.36,1073.88) 409.36,1129.44 598.47,1318.54 808.31,1318.54 828.26,1298.59 v1(828.26,1276.76)
  Bottom Layer w4: P3.12@358.74,1072.83 359.26,1073.36 408.84,1073.36 v1(409.36,1073.88)